# EAGLE board CT_schematic (EAGLE 7.6.0)

Size 100 x 80 mm. Coordinates in mm from the lower left corner, seen from the top.
Outline: 0,0 100,0 100,80 0,80 0,0
Copper layers (1*16): Top 0.035mm / dielectric 1.5mm / Bottom 0.035mm
Design rules "default": minimum track width 10mil, minimum drill 24mil, track to track 8mil, track to pad 8mil, pad to pad 8mil, via to via 8mil, smd to smd 8mil, copper to edge 40mil, drill to drill 8mil, minimum pad ring 10mil, minimum via ring 8mil, stop-mask expansion 4mil, vias tented up to drill 0mil, thermal gap 10mil

## Footprints (pad centres in the part's own frame; a part is rotated, then mirrored left to right if it is on the bottom)
C0603 = smd 0.8 x 0.8: 1 -0.762,0; 2 0.762,0
C0402 = smd 0.5 x 0.5: 1 -0.508,0; 2 0.508,0
C0805 = smd 1.2 x 1.3: 1 -1.016,0; 2 1.016,0
C1206 = smd 1.3 x 1.6: 1 -1.524,0; 2 1.524,0
L0603 = smd 0.8 x 0.8: 1 -0.762,0; 2 0.762,0
DR1040 = smd 1.6 x 3.2: 1 -4.458,0; 2 4.458,0
R0603 = smd 0.8 x 0.8: 1 -0.762,0; 2 0.762,0
LQFP48 = smd 0.3 x 1.2: 1 -2.75,-4.25; 2 -2.25,-4.25; 3 -1.75,-4.25; 4 -1.25,-4.25; 5 -0.75,-4.25; 6 -0.25,-4.25; 7 0.25,-4.25; 8 0.75,-4.25; 9 1.25,-4.25; 10 1.75,-4.25; 11 2.25,-4.25; 12 2.75,-4.25; 25 2.75,4.25; 26 2.25,4.25; 27 1.75,4.25; 28 1.25,4.25; 29 0.75,4.25; 30 0.25,4.25; 31 -0.25,4.25; 32 -0.75,4.25; 33 -1.25,4.25; 34 -1.75,4.25; 35 -2.25,4.25; 36 -2.75,4.25 | smd 1.2 x 0.3: 13 4.25,-2.75; 14 4.25,-2.25; 15 4.25,-1.75; 16 4.25,-1.25; 17 4.25,-0.75; 18 4.25,-0.25; 19 4.25,0.25; 20 4.25,0.75; 21 4.25,1.25; 22 4.25,1.75; 23 4.25,2.25; 24 4.25,2.75; 37 -4.25,2.75; 38 -4.25,2.25; 39 -4.25,1.75; 40 -4.25,1.25; 41 -4.25,0.75; 42 -4.25,0.25; 43 -4.25,-0.25; 44 -4.25,-0.75; 45 -4.25,-1.25; 46 -4.25,-1.75; 47 -4.25,-2.25; 48 -4.25,-2.75
TDFN-8/6MM = smd 0.3 x 0.75: 1 0,0; 2 0.5,0; 3 1,0; 4 1.5,0; 5 1.5,3; 6 1,3; 7 0.5,3; 8 0,3
ABS07-32.768KHZ-7-T = smd 1.1 x 2.4: 1 -2.5,0; 2 0,0
ASDMB-XX.XXXXMHZ-XX-XX-XXX = smd 0.65 x 0.85: 1 0.45,0.2; 2 2.05,0.2; 3 2.05,1.8; 4 0.45,1.8
TSOT-23-5 = smd 1.3 x 0.62: 1 -1.31,0.95; 2 -1.31,0; 3 -1.31,-0.95; 4 1.31,-0.95; 5 1.31,0.95
DFN8_2X3MC = smd 0.813 x 0.305: 1 -1.398,0.75; 2 -1.398,0.25; 3 -1.398,-0.25; 4 -1.398,-0.75; 5 1.398,-0.75; 6 1.398,-0.25; 7 1.398,0.25; 8 1.398,0.75 | smd 1.753 x 1.549: 9 0,0
JST-2-SMD = smd 1 x 4.6: 1 -1,-3.7; 2 1,-3.7 | smd 1.6 x 3.4: NC1 -3.4,1.5; NC2 3.4,1.5
FCI_10118193-0001LF = smd 0.4 x 1.35: 1 -1.3,2.675; 2 -0.65,2.675; 3 0,2.675; 4 0.65,2.675; 5 1.3,2.675 | smd 1.6 x 1.4: 6 -3.2,2.45; 7 3.2,2.45 | smd 1.9 x 1.9: 8 -1.2,0; 9 1.2,0 | hole 0.5: -3.3,0; 3.3,0
SON-6 = smd 0.55 x 0.3: 1 -0.355,0.5 | smd 0.52 x 0.3: 2 -0.37,0; 3 -0.37,-0.5; 4 0.37,-0.5; 5 0.37,0; 6 0.37,0.5
SW_4-1437565-2 = smd 1.4 x 2.1: 1 -2.23,4.55; 2 -2.23,-4.55; 3 2.23,4.55; 4 2.23,-4.55
LGM67K-G1J2-24-Z = smd 0.8 x 1.4: A -2,0; C 0,0
NC7SZ125M5X = smd 1.3 x 0.7: 1 -1.3,0.95; 2 -1.3,0; 3 -1.3,-0.95; 4 1.3,-0.95; 5 1.3,0.95

## Placement (x,y rotation side)
C1  1e-06  [C0603]  -33.02,55.88 0 top  (outside the outline)
C2  1e-07  [C0603]  -36.83,55.88 0 top  (outside the outline)
C3  1e-07  [C0603]  -40.64,55.88 0 top  (outside the outline)
C4  1e-07  [C0603]  -44.45,55.88 0 top  (outside the outline)
C5  1e-07  [C0603]  -48.26,55.88 0 top  (outside the outline)
C6  1e-07  [C0603]  -52.07,55.88 0 top  (outside the outline)
C7  4.7e-06  [C0603]  -29.21,55.88 0 top  (outside the outline)
C8  1e-08  [C0603]  -55.88,55.88 0 top  (outside the outline)
C9  1e-06  [C0603]  -15.24,60.96 0 top  (outside the outline)
C10  1e-11  [C0402]  -45.72,60.96 0 top  (outside the outline)
C11  1e-11  [C0402]  -49.53,60.96 0 top  (outside the outline)
C12  1e-08  [C0402]  -53.34,60.96 0 top  (outside the outline)
C13  1e-08  [C0402]  -57.15,60.96 0 top  (outside the outline)
C14  1e-05  [C0805]  -34.29,44.45 0 top  (outside the outline)
C15  1e-05  [C0805]  -39.37,44.45 0 top  (outside the outline)
C16  1e-07  [C0402]  -15.24,66.04 0 top  (outside the outline)
C17  1e-05  [C1206]  -16.51,45.72 0 top  (outside the outline)
C18  1e-05  [C1206]  -22.86,45.72 0 top  (outside the outline)
C19  1e-08  [C0402]  -19.05,66.04 0 top  (outside the outline)
F1  240.0  [L0603]  -19.05,60.96 0 top  (outside the outline)
I1  5.2e-06  [DR1040]  -44.45,6.35 0 top  (outside the outline)
R1  10000.0  [R0603]  -25.4,50.8 0 top  (outside the outline)
R2  1000.0  [R0603]  -22.86,60.96 0 top  (outside the outline)
R3  910.0  [R0603]  -26.67,60.96 0 top  (outside the outline)
R4  4700.0  [R0603]  -30.48,60.96 0 top  (outside the outline)
R5  2200.0  [R0603]  -34.29,60.96 0 top  (outside the outline)
R6  2200.0  [R0603]  -38.1,60.96 0 top  (outside the outline)
R7  10000.0  [R0603]  -30.48,50.8 0 top  (outside the outline)
R8  10000.0  [R0603]  -35.56,50.8 0 top  (outside the outline)
R9  10000.0  [R0603]  -40.64,50.8 0 top  (outside the outline)
R10  10000.0  [R0603]  -45.72,50.8 0 top  (outside the outline)
R11  10000.0  [R0603]  -50.8,50.8 0 top  (outside the outline)
R12  490000.0  [R0603]  -57.15,44.45 0 top  (outside the outline)
R13  1000000.0  [R0603]  -52.07,44.45 0 top  (outside the outline)
R14  10000.0  [R0603]  -55.88,50.8 0 top  (outside the outline)
R15  10000.0  [R0603]  -15.24,55.88 0 top  (outside the outline)
R16  82000.0  [R0603]  -20.32,55.88 0 top  (outside the outline)
R17  300000.0  [R0603]  -15.24,50.8 0 top  (outside the outline)
R18  120000.0  [R0603]  -20.32,50.8 0 top  (outside the outline)
R19  2000.0  [R0603]  -41.91,60.96 0 top  (outside the outline)
R20  10000.0  [R0603]  -25.4,55.88 0 top  (outside the outline)
U1  STM32F318C8T6  [LQFP48]  -39.37,27.94 0 top  (outside the outline)
U2  24AA32AT-I/MNY  [TDFN-8/6MM]  -57.15,25.4 0 top  (outside the outline)
U3  ABS07-32.768KHZ-7-T  [ABS07-32.768KHZ-7-T]  -39.37,36.83 0 top  (outside the outline)
U4  ASDMB-25.000MHZ-EC-T  [ASDMB-XX.XXXXMHZ-XX-XX-XXX]  -16.51,1.27 0 top  (outside the outline)
U5  ltc3406es5  [TSOT-23-5]  -44.45,44.45 0 top  (outside the outline)
U6  MCP73831T-2ACI/MC  [DFN8_2X3MC]  -27.94,64.77 0 top  (outside the outline)
U7  S2B-PH-SM4-TB(LF)(SN)  [JST-2-SMD]  -22.86,27.94 0 top  (outside the outline)
U8  10118193-0001LF  [FCI_10118193-0001LF]  -19.05,36.83 0 top  (outside the outline)
U9  TPS3895ADRYR  [SON-6]  -21.59,64.77 0 top  (outside the outline)
U10  4-1437565-2  [SW_4-1437565-2]  -34.29,6.35 0 top  (outside the outline)
U11  Q65110A2395  [LGM67K-G1J2-24-Z]  -48.26,36.83 0 top  (outside the outline)
U12  nc7sz125m5x  [NC7SZ125M5X]  -27.94,44.45 0 top  (outside the outline)

## Library data of the parts
C1-C19 F1 I1 R1-R20 U1-U12 = circuit_tree

## Nets
CLK_CRYSTAL_U1_3: C10.1 U1.3 U3.1
CLK_CRYSTAL_U1_4: C11.1 U1.4 U3.2
CLK_U1_5: U1.5 U4.3
GND: C1.2 C2.2 C3.2 C4.2 C5.2 C6.2 C7.2 C8.2 C9.2 C10.2 C11.2 C12.2 C13.2 C14.2 C15.1 C15.2 C16.2 C17.2 C18.2 C19.2 R2.2 R7.2 R8.2 R10.2 R11.2 R12.2 R16.2 R18.2 R19.2 U1.8 U1.23 U1.35 U1.47 U2.4 U2.7 U4.2 U5.2 U6.6 U6.9 U7.2 U8.5 U8.6 U8.7 U8.8 U8.9 U9.2 U11.C U12.1 U12.3
INPUT_USBPOWER_5V: C17.1 R20.2 U6.1 U6.2 U8.1
NET_U1_7: R4.1 U1.7 U12.4
NET_U1_9: C8.1 C9.1 F1.1 U1.9
NET_U1_37: R6.1 U1.37 U2.5
NET_U1_38: R5.1 U1.38 U2.6
NET_U1_43: R8.1 U1.43
NET_U1_44: R7.1 U1.44
NET_U1_45: R3.1 U1.45 U11.A
NET_U1_46: R1.1 U1.46 U10.3 U10.4
NET_U2_1: R9.1 U2.1
NET_U2_2: R10.1 U2.2
NET_U2_3: R11.1 U2.3
NET_U5_1: U5.1
NET_U5_3: I1.1 U5.3
NET_U5_5: R12.1 R13.1 U5.5
NET_U5_ATNET_3: I1.2 R13.2
NET_U6_5: R20.1 U6.5
NET_U6_8: R19.1 U6.8
NET_U9_1: R15.1 R16.1 U9.1
NET_U9_3: R17.2 R18.1 U9.3
NET_U9_4: R14.1 U9.4 U12.2
NET_U10_1: R2.1 U10.1 U10.2
VCC_S1_3V7: C14.1 C18.1 U5.4 U6.3 U6.4 U7.1
VCC_TIER1_1V8: C1.1 C2.1 C3.1 C4.1 C5.1 C6.1 C7.1 C12.1 C13.1 C15.2 C16.1 C19.1 F1.2 I1.2 R1.2 R3.2 R4.2 R5.2 R6.2 R9.2 R13.2 R14.2 R15.2 R17.1 U1.1 U1.24 U1.36 U1.48 U2.8 U4.4 U9.6 U12.5

## Tracks (layer width: path | path; a pad name or v marks a point on that pad's centre or on a via)
CLK_CRYSTAL_U1_3  (2 unrouted)
CLK_CRYSTAL_U1_4  (2 unrouted)
CLK_U1_5  (1 unrouted)
GND  (48 unrouted)
INPUT_USBPOWER_5V  (4 unrouted)
NET_U1_7  (2 unrouted)
NET_U1_9  (3 unrouted)
NET_U1_37  (2 unrouted)
NET_U1_38  (2 unrouted)
NET_U1_43  (1 unrouted)
NET_U1_44  (1 unrouted)
NET_U1_45  (2 unrouted)
NET_U1_46  (3 unrouted)
NET_U2_1  (1 unrouted)
NET_U2_2  (1 unrouted)
NET_U2_3  (1 unrouted)
NET_U5_3  (1 unrouted)
NET_U5_5  (2 unrouted)
NET_U5_ATNET_3  (1 unrouted)
NET_U6_5  (1 unrouted)
NET_U6_8  (1 unrouted)
NET_U9_1  (2 unrouted)
NET_U9_3  (2 unrouted)
NET_U9_4  (2 unrouted)
NET_U10_1  (2 unrouted)
VCC_S1_3V7  (5 unrouted)
VCC_TIER1_1V8  (31 unrouted)